# Altium PCB L298N Motor Driver Module PCB.PcbDoc
Units mm, origin at the board's own origin, x right, y up, seen from the top; angles counter-clockwise.
Board outline 53.34 x 43.18 mm, 2 copper layers (Top Layer, Bottom Layer), stack 1.64 mm thick; 36 components, 23 nets, 97 pads, 96 vias.
Unrouted connection lines stored in the file: 26.
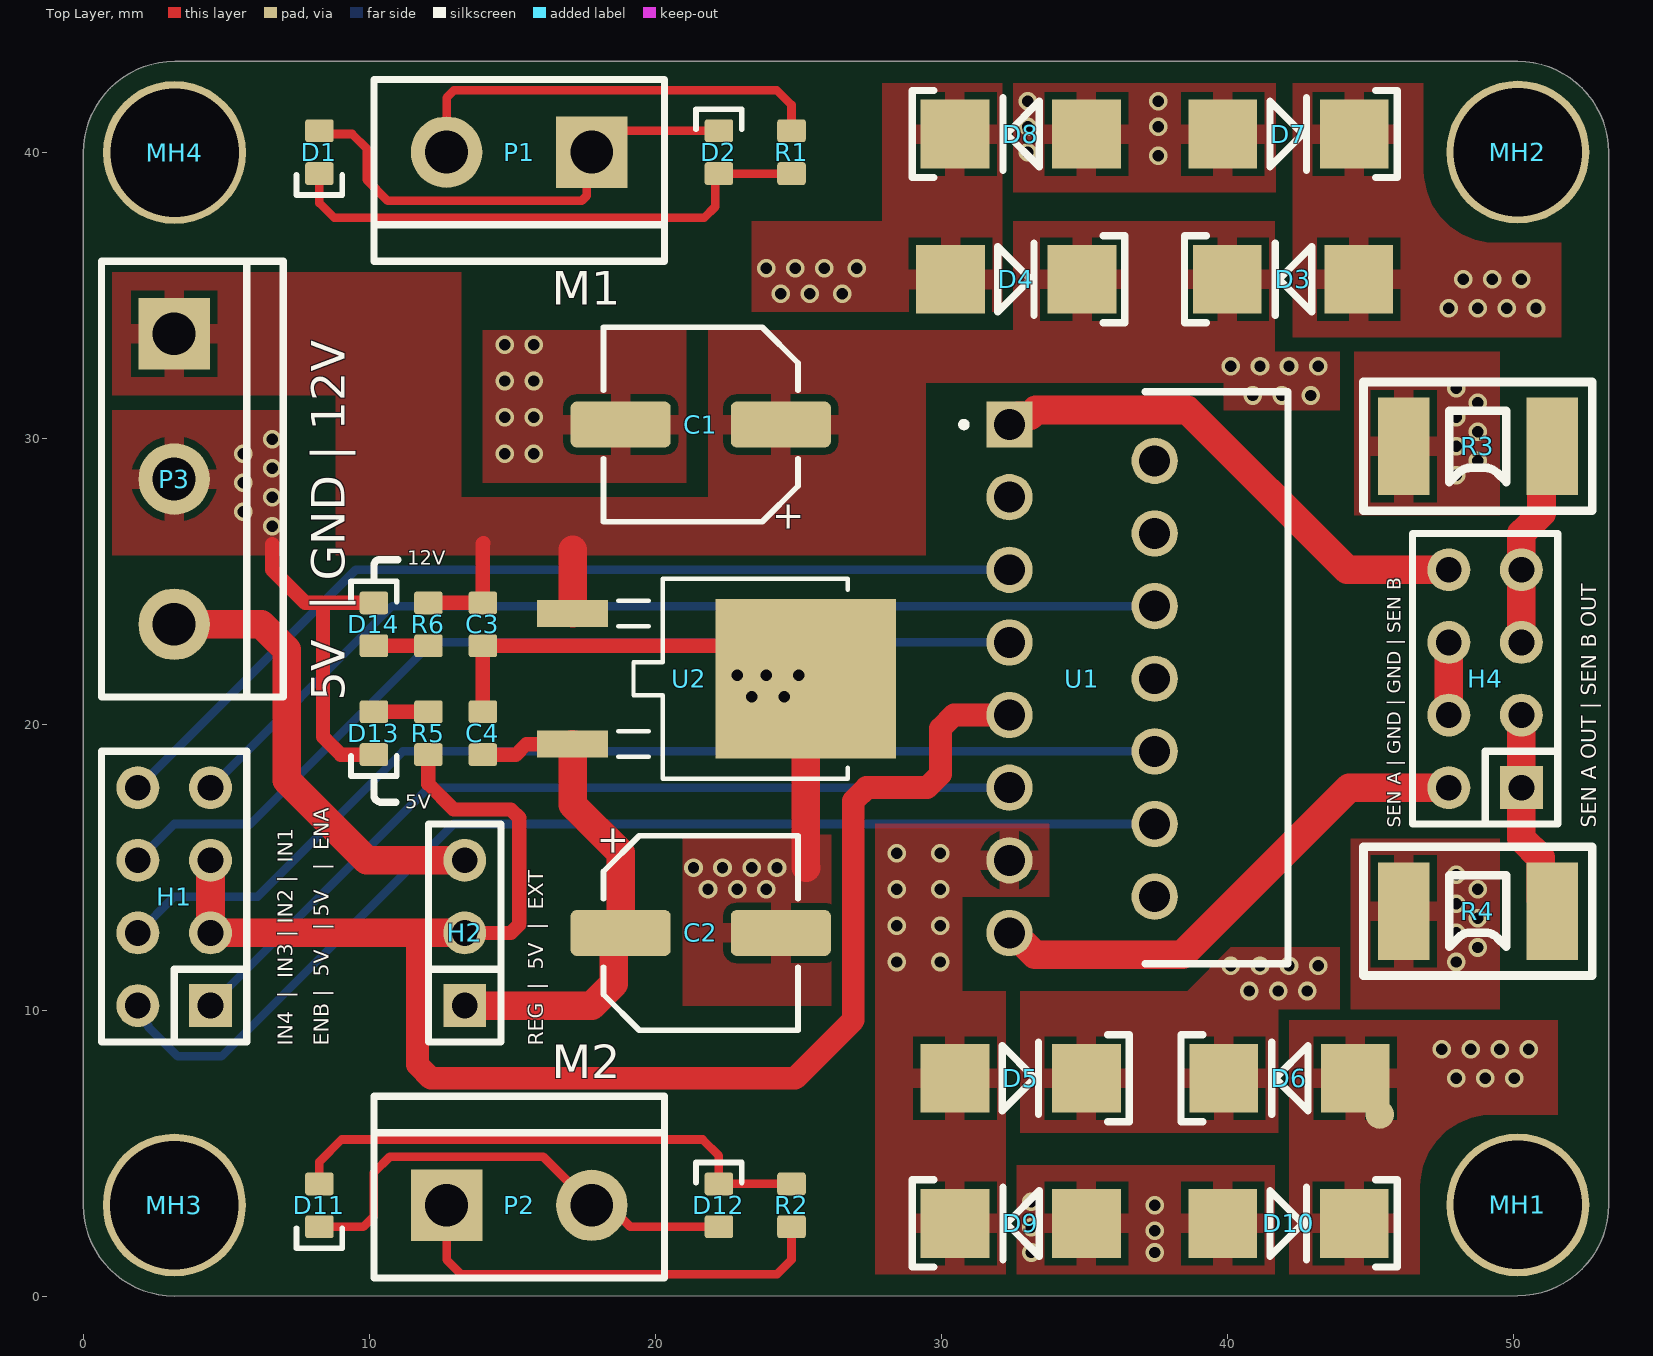
[diagram p0: Top Layer view]
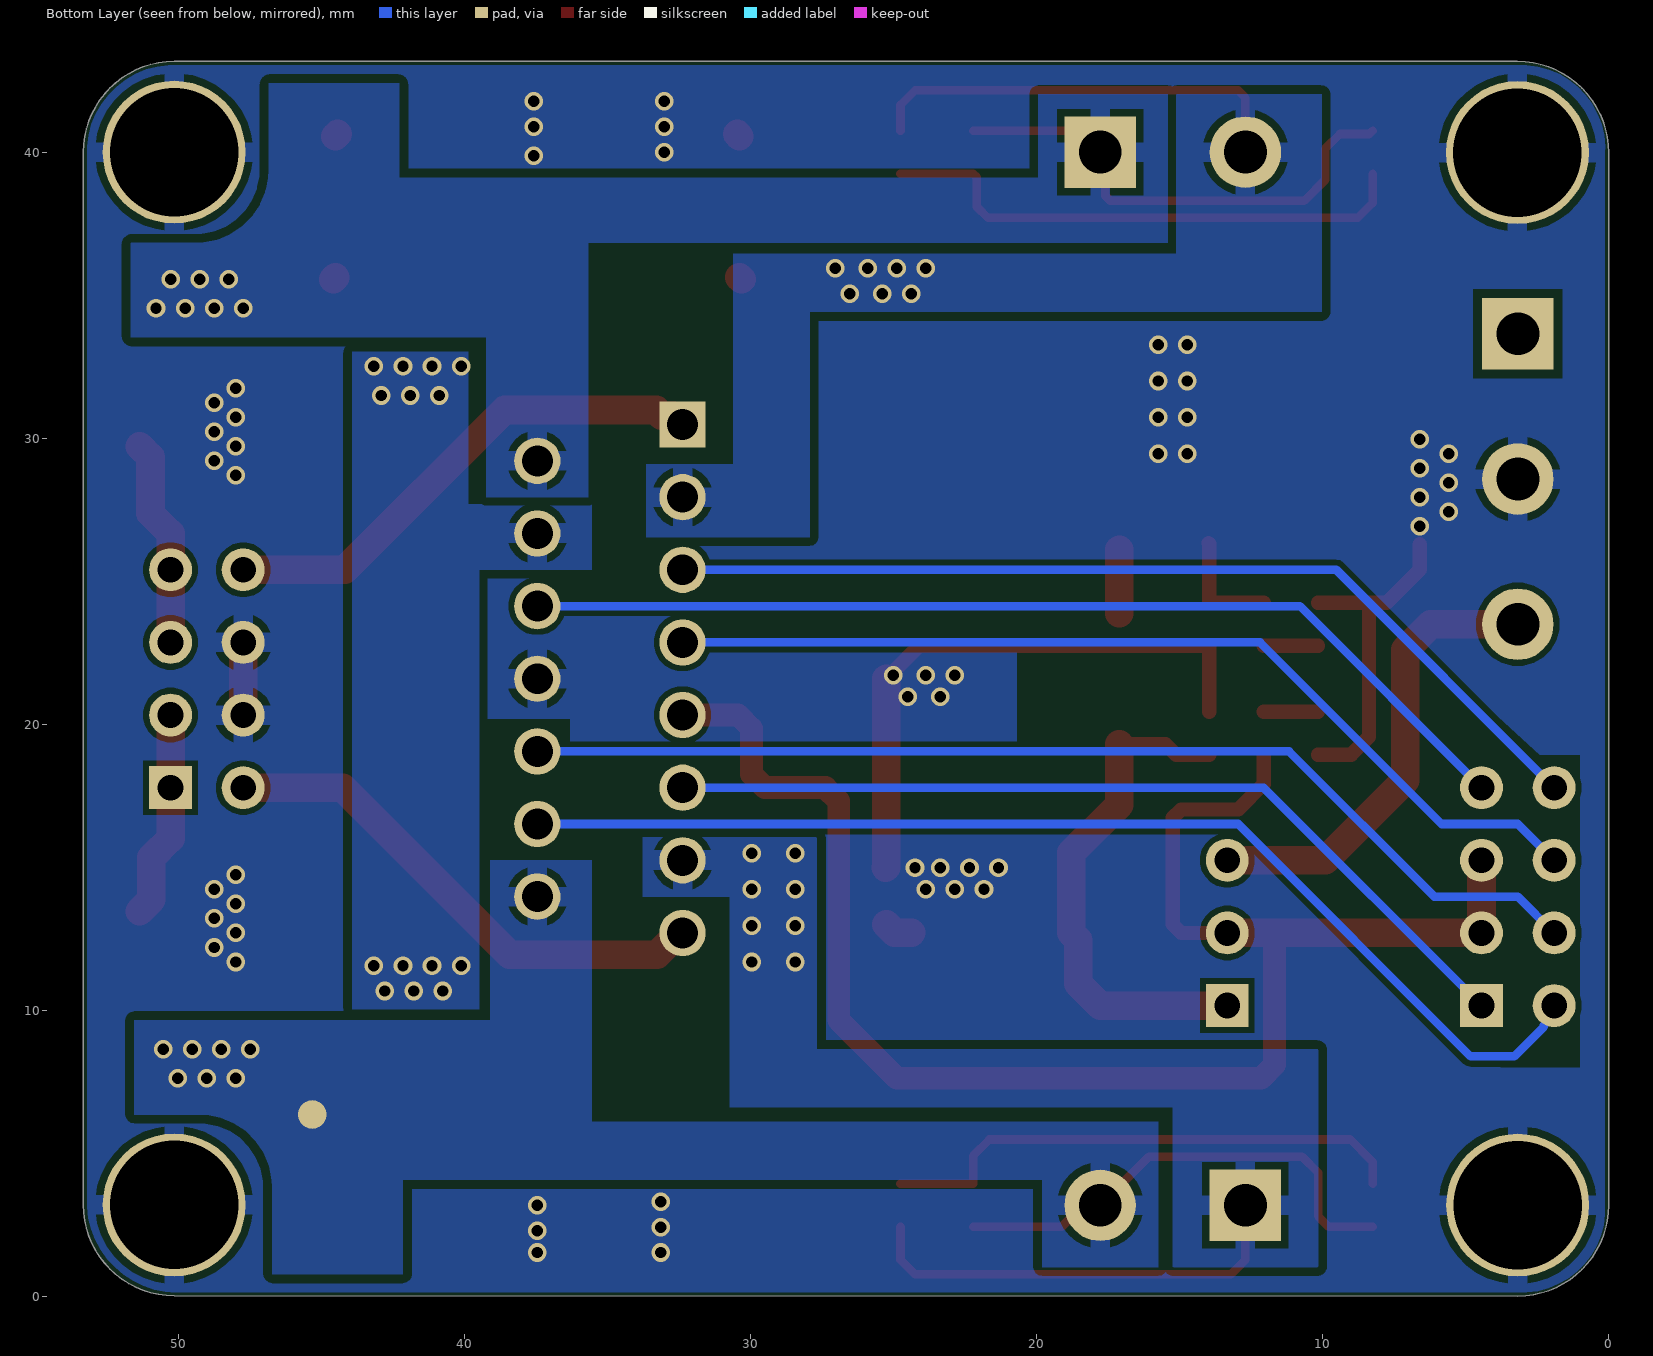
[diagram p1: Bottom Layer view, seen from below]
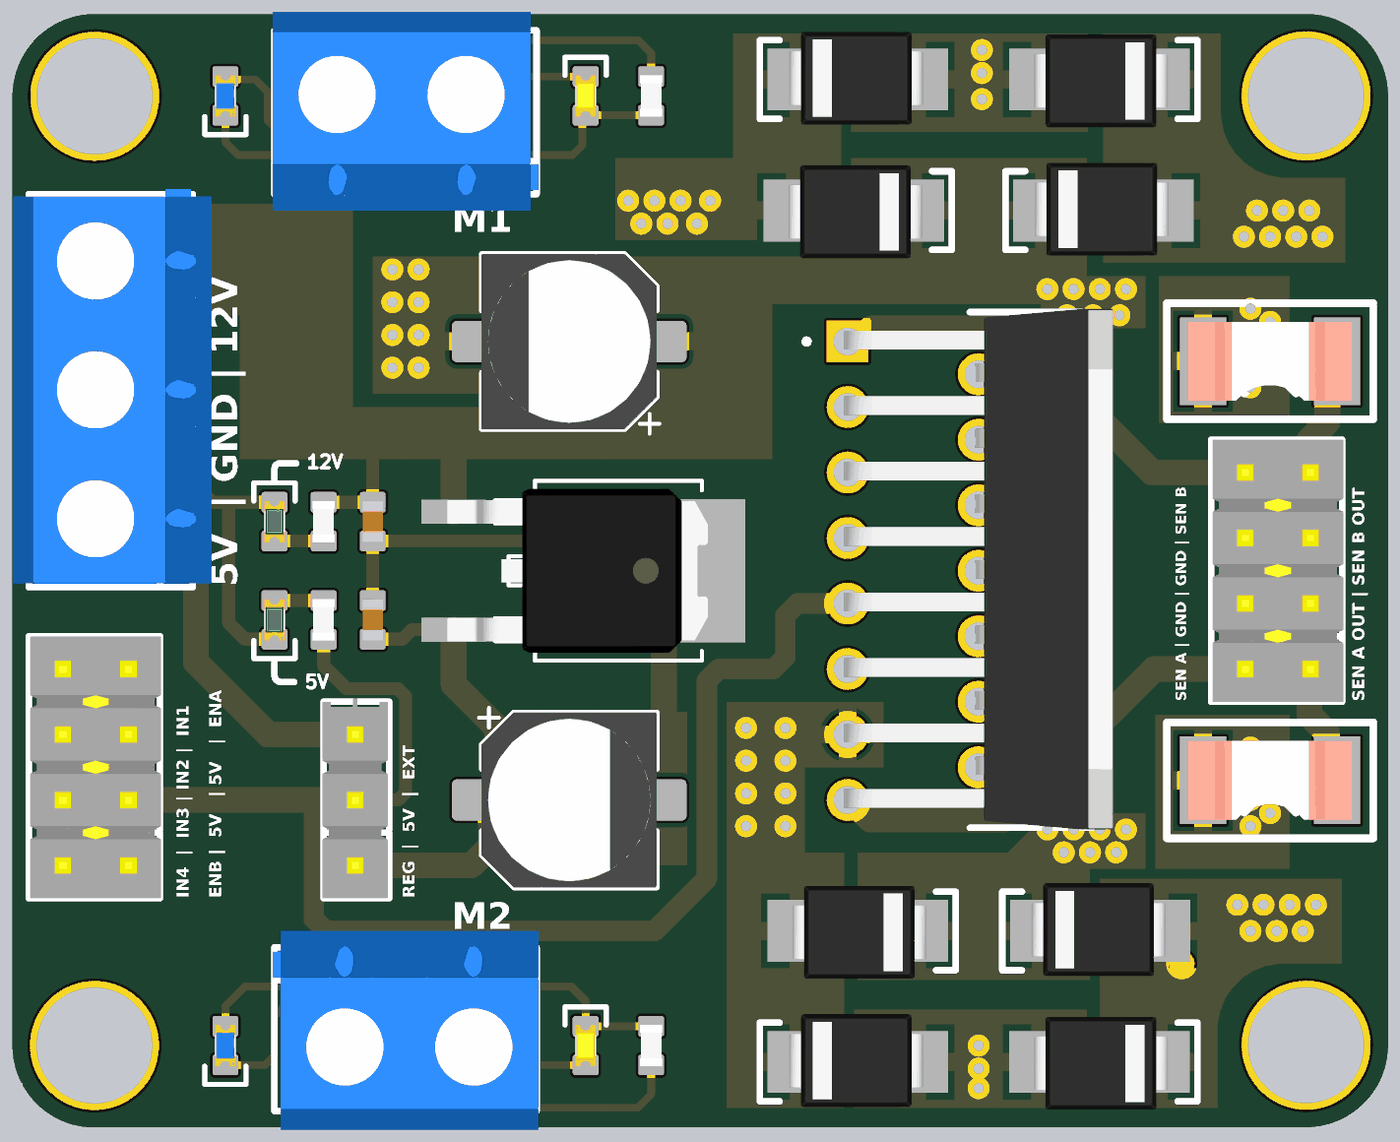
[diagram p2: 3D render of the assembled board from above, using the file's embedded part models]

## Layer stack, top to bottom
Top Solder: solder mask 0.0102, Solder Resist, Dk 3.5
Top Layer: signal copper 0.07
Dielectric 1: dielectric 1.5, FR-4, Dk 4.8
Bottom Layer: signal copper 0.07
Bottom Solder: solder mask 0.0102, Solder Resist, Dk 3.5

## Board outline
3.179,0 cw(c3.179,3.179) 0,3.179 0,39.99 cw(c3.19,39.99) 3.19,43.18 50.165,43.18 cw(c50.165,40.005) 53.34,40.005 53.34,3.189 cw(c50.165,3.189) 50.165,0.014

## Design rules (kind name [scope] priority, off if disabled: settings)
Clearance Clearence_Power [InNetClass('Power')] p1: gap=0.3 ignorepadtopadclearanceinfootprint=FALSE except(0: Arc-Hole Track-Hole SMDPad-Hole THPad-Hole Via-Hole Fill-Hole Poly-Hole Region-Hole Text-Hole)
Clearance Clearance_General [All] p2: gap=0.2 ignorepadtopadclearanceinfootprint=FALSE except(0: Arc-Hole Track-Hole SMDPad-Hole THPad-Hole Via-Hole Fill-Hole Poly-Hole Region-Hole Text-Hole)
HoleSize [All] p1: absolutevalues=TRUE maxlimit=5 minlimit=0.025 maxpercent=80.000 minpercent=20.000
MinimumSolderMaskSliver [All] p1: minsoldermaskwidth=0.005
PolygonConnect [All] p1: thpad.connectstyle=Relief thpad.reliefconductorwidth=0.7 thpad.reliefentries=4 thpad.polygonreliefangle="90 Angle" thpad.airgapwidth=0.254 smdpad.connectstyle=Relief smdpad.reliefconductorwidth=0.7 smdpad.reliefentries=4 smdpad.polygonreliefangle="90 Angle" smdpad.airgapwidth=0.254 via.connectstyle=Direct via.reliefconductorwidth=0.254 via.reliefentries=4 via.polygonreliefangle="90 Angle" via.airgapwidth=0.254
RoutingVias RoutingVias_Power [InNetClass('+5V Rail') OR InNetClass('Power')] p1: holewidth=0.5 width=1 viastyle="Through Hole" minholewidth=0.4 minwidth=0.8 maxholewidth=0.5 maxwidth=1
RoutingVias [All] p2: holewidth=0.4 width=0.8 viastyle="Through Hole" minholewidth=0.3 minwidth=0.6 maxholewidth=0.5 maxwidth=1
SilkToSilkClearance [All] p1: silktosilkclearance=0.1
SilkToSolderMaskClearance [IsPad] p1: minsilkscreentomaskgap=0.1 clearancetoexposedcopper=TRUE
SolderMaskExpansion [All] p1: expansion=0.102 istentingtop=FALSE
Width Width_5V_Rail [All] p1: maxlimit=1 minlimit=0.3 preferedwidth=0.5 minimp=50.000000 maximp=50.000000 favimp=50.000000
Width Width_VS_Power [InNetClass('Power')] p2: maxlimit=3 minlimit=1.5 preferedwidth=2 minimp=50.000000 maximp=50.000000 favimp=50.000000
Width [All] p3: maxlimit=0.5 minlimit=0.2 preferedwidth=0.3 minimp=50.000000 maximp=50.000000 favimp=50.000000
26 further rules are at their usual default settings.

## Classes and differential pairs
net class "+5V Rail": +5V
net class Power: OUT_1 OUT_2 OUT_3 OUT_4 Vs

## Components (designator, comment, footprint, x,y, rotation, side; value= is the part's Value field where it differs from the comment)
C1 "100uf" CAP_AE_SMD_D6MM3_H5M55 21.59,30.48 r180 top
C2 "100uf" CAP_AE_SMD_D6MM3_H5M55 21.59,12.7 r0 top
C3 "Cap" CAP_0603 13.97,23.495 r90 top value=0.1uf
C4 "Cap" CAP_0603 13.97,19.685 r270 top value=0.1uf
D1 "BLUE" LED_0603_BLUE 8.255,40.005 r90 top
D2 "YELLOW" LED_0603_YELLOW 22.225,40.005 r270 top
D3 "Diode" DIODE_M7_SMA 44.605,35.56 r180 top
D4 "Diode" DIODE_M7_SMA 30.325,35.56 r0 top
D5 "Diode" DIODE_M7_SMA 30.48,7.62 r0 top
D6 "Diode" DIODE_M7_SMA 44.478,7.62 r180 top
D7 "Diode" DIODE_M7_SMA 39.85,40.64 r0 top
D8 "Diode" DIODE_M7_SMA 35.08,40.64 r180 top
D9 "Diode" DIODE_M7_SMA 35.08,2.54 r180 top
D10 "Diode" DIODE_M7_SMA 39.85,2.54 r0 top
D11 "BLUE" LED_0603_BLUE 8.255,3.175 r90 top
D12 "YELLOW" LED_0603_YELLOW 22.225,3.175 r270 top
D13 "GREEN" LED_0603_GREEN 10.16,19.685 r90 top
D14 "GREEN" LED_0603_GREEN 10.16,23.495 r270 top
H1 "Header 4X2" "HEADER 2X4 2.54MM" 4.445,10.16 r90 top
H2 "Header 3" HEADER_1X3_2.54MM 13.335,10.16 r90 top
H4 "Header 4X2" "HEADER 2X4 2.54MM" 50.292,17.78 r90 top
MH1 "Mount_Hole_M4" MH_M4 50.165,3.189 r0 top
MH2 "Mount_Hole_M4" MH_M4 50.165,40.005 r0 top
MH3 "Mount_Hole_M4" MH_M4 3.179,3.179 r0 top
MH4 "Mount_Hole_M4" MH_M4 3.19,39.99 r0 top
P1 "MHDR1X2" "TERMINAL BLOCK 2 PIN 5.08MM" 17.78,40.005 r180 top
P2 "MHDR1X2" "TERMINAL BLOCK 2 PIN 5.08MM" 12.7,3.175 r0 top
P3 "TerminalBlock" "TERMINAL BLOCK 3 PIN 5.08MM" 3.175,33.655 r270 top
R1 "Res1" RES_0603 24.765,40.005 r270 top value=1.5k
R2 "Res1" RES_0603 24.765,3.175 r270 top value=1.5K
R3 "CSS2H-2512" CSS2H-2512 48.768,29.718 r0 top
R4 "CSS2H-2512" CSS2H-2512 48.768,13.462 r0 top
R5 "Res1" RES_0603 12.065,19.685 r270 top value=470R
R6 "Res1" RES_0603 12.065,23.495 r90 top value=1.5K
U1 "L298N" TO127P2020X500X2100-15 32.385,30.48 r0 top
U2 "L78M05CDT-TR" DPAK_STM 23.495,21.59 r270 top

## Footprints (in the part's own frame and the unit in brackets; to place one, negate y for a bottom-side part, rotate by r counter-clockwise, add the part's x,y. Pads: shape width x height; smd on the part's side, far side on the other; paste and mask are expansions set on the pad)
CAP_0603 [mm]
  rrect25% 0.8x1 smd: 1(-0.75,0) 2(0.75,0)
  body extent -0.8,-0.4 0.8,0.4, height 0.51
CAP_AE_SMD_D6MM3_H5M55 [mm] "Aluminum Electrolytic Capacitor, Body 6.30x6.60x5.50mm, IPC Low Density"
  rrect25% 3.5x1.6 smd: 1(-2.8,0) 2(2.8,0)
  silkscreen extent -3.4,-3.4 3.4,3.4, body extent -3.4,-3.4 3.4,3.4, height 6.4
CSS2H-2512 [mm]
  rect 1.8x3.4 smd: 1(-2.6,0) 2(2.6,0)
  silkscreen extent -4,-2.25 4,2.25, body extent -3.17,-1.52 3.18,1.52, height 0.84
DIODE_M7_SMA [mm]
  rect 2.4x2.4 smd mask+0: 1(0,0) 2(4.6,0)
  silkscreen extent 1.65,-1.52 6.1,1.52, body extent -0.24,-1.85 4.96,1.75, height 2.62
DPAK_STM [mil]
  rect 37x98 smd paste+0 mask+0: 1(-90,-251.5) 2(90,-251.5)
  rect 219x248 smd paste+0 mask+0: 3(0,69.5)
  silkscreen extent -138,-189 138,128, body extent -125,-261 125,136, height 94
"HEADER 2X4 2.54MM" [mm]
  rect 1.5x1.5 hole 0.9: 1(0,0)
  round 1.5 hole 0.9: 2(0,2.54) 3(2.54,0) 4(2.54,2.54) 5(5.08,0) 6(5.08,2.54) 7(7.62,0) 8(7.62,2.54)
  silkscreen extent -1.27,-1.27 8.89,3.81, body extent -1.27,-1.32 8.89,3.76, height 8.38
HEADER_1X3_2.54MM [mm]
  rect 1.5x1.5 hole 0.9: 1(0,0)
  round 1.5 hole 0.9: 2(2.54,0) 3(5.08,0)
  silkscreen extent -1.27,-1.27 6.35,1.27, body extent -1.27,-1.22 6.48,1.32, height 8.38
LED_0603_BLUE [mm]
  rrect25% 0.8x1 smd: A(0.75,0) K(-0.75,0)
  silkscreen extent -1.5,-0.8 -0.8,0.8, body extent -0.8,-0.4 0.8,0.4, height 0.6
LED_0603_GREEN [mm]
  rrect25% 0.8x1 smd: A(0.75,0) K(-0.75,0)
  silkscreen extent -1.5,-0.8 -0.8,0.8, body extent -0.8,-0.4 0.8,0.4, height 0.6
LED_0603_YELLOW [mm]
  rrect25% 0.8x1 smd: A(0.75,0) K(-0.75,0)
  silkscreen extent -1.5,-0.8 -0.8,0.8, body extent -0.8,-0.4 0.8,0.4, height 0.6
MH_M4 [mm]
  round 5 hole 4.5: MH(0,0)
RES_0603 [mm]
  rrect25% 0.8x1 smd: 1(-0.75,0) 2(0.75,0)
  body extent -0.8,-0.43 0.8,0.43, height 0.52
"TERMINAL BLOCK 2 PIN 5.08MM" [mm]
  rect 2.5x2.5 hole 1.5: 1(0,0)
  round 2.5 hole 1.5: 2(5.08,0)
  silkscreen extent -2.54,-2.54 7.62,3.81, body extent -2.61,-3.25 7.69,4.45, height 10
"TERMINAL BLOCK 3 PIN 5.08MM" [mm]
  rect 2.5x2.5 hole 1.5: 1(0,0)
  round 2.5 hole 1.5: 2(5.08,0) 3(10.16,0)
  silkscreen extent -2.54,-2.54 12.7,3.81, body extent -2.75,-3.15 12.55,4.55, height 10
TO127P2020X500X2100-15 [mm]
  rect 1.62x1.62 hole 1.08: 1(0,0)
  round 1.62 hole 1.08: 2(5.08,-1.27) 3(0,-2.54) 4(5.08,-3.81) 5(0,-5.08) 6(5.08,-6.35) 7(0,-7.62) 8(5.08,-8.89) 9(0,-10.16) 10(5.08,-11.43) 11(0,-12.7) 12(5.08,-13.97) 13(0,-15.24) 14(5.08,-16.51) 15(0,-17.78)
  silkscreen extent -1.69,-18.86 9.74,1.14, body extent -0.13,-18.93 10.29,1.27, height 24.15

## Part data
C1 C2: library part CAP_ALEL_6.3x5.5, "Capacitor SMD Aluminium Electrolytic 6.3mm Diameter 5.5mm Height"
C3 C4: "Capacitor", LatestRevisionDate=17-Jul-2002, LatestRevisionNote="Re-released for DXP Platform.", PackageDescription="Radial Cap, Thru-Hole; 2 Leads; 0.3 in Pin Spacing", PackageReference=RAD-0.3, Published=8-Jun-2000, Publisher="Altium Limited"
D1 D11: library part LED_0603_BLUE, "LED 0603 BLUE SMD"
D2 D12: library part LED_0603_YELLOW, "LED 0603 YELLOW SMD"
D3 D4 D5 D6 D7 D8 D9 D10: "Default Diode", Code_JEDEC=DO-214-AB, LatestRevisionDate=17-Jul-2002, LatestRevisionNote="Re-released for DXP Platform.", PackageDescription="DO-214-AB/SMC; 2 C-Bend Leads; Body 7.9 x 5.9 mm, inc. leads (LxW)", PackageReference=SMC, PackageVersion=Sep-1996, Published=8-Jun-2000, Publisher="Altium Limited"
D13 D14: library part LED_0603_GREEN, "LED 0603 GREEN SMD"
H1 H4: "Header, 4-Pin, Dual row", LatestRevisionDate=17-Jul-2002, LatestRevisionNote="Re-released for DXP Platform.", Publisher="Altium Limited"
H2: "Header, 3-Pin", LatestRevisionDate=17-Jul-2002, LatestRevisionNote="Re-released for DXP Platform.", Publisher="Altium Limited"
P1 P2: "Header, 2-Pin", LatestRevisionDate=17-Jul-2002, LatestRevisionNote="Re-released for DXP Platform.", Publisher="Altium Limited"
P3: library part "Header 3", "Header, 3-Pin", LatestRevisionDate=17-Jul-2002, LatestRevisionNote="Re-released for DXP Platform.", Publisher="Altium Limited"
R1 R2 R5 R6: "Resistor", LatestRevisionDate=17-Jul-2002, LatestRevisionNote="Re-released for DXP Platform.", PackageDescription="Axial Device, Thru-Hole; 2 Leads; 0.3 in Pin Spacing", PackageReference=AXIAL-0.3, Published=8-Jun-2000, Publisher="Altium Limited"
R3 R4: "Current Sense Resistor SMD CSS2H-2512", Manufacturer=Bourns, Manufacturer Part Number=CSS2H-2512
U1: "Dual Full Bridge Motor Driver 15-Pin(15+Tab) MULTIWATT V Tube", Package=None, Availability=Unavailable, MP=L298N, Price=None
U2: "Precision 500 mA regulators", Manufacturer_Name=STMicroelectronics, Copyright="Copyright (C) 2025 Ultra Librarian. All rights reserved.", Manufacturer_Part_Number=L78M05CDT-TR, RefDes=RefDes, Type=Type

## Free pads (board coordinates)
  round 1 all layers, no hole mask+0.102: 3(45.339,6.35)

## Via types
v1: diameter 0.65, hole 0.399, Top Layer to Bottom Layer, 96 vias

## Nets (pads, with @x,y where several pads share a name; then routed paths per layer and width w, separated by ;. In a path a pad name is that pad's centre, name@x,y a point inside that pad or via, vN(x,y) a via of type N, cw(c..) or ccw(c..) an arc to the next point about the centre after c; other vN are vias at no path point)
+5V: H1.3 H1.5 H2.2 R5.2 U1.9 | length 59.7
  Top Layer w0.5: R5.2 12.065,17.907 12.954,17.018 14.947,17.018 15.24,16.725 15.24,12.993 14.947,12.7 H2.2
  Top Layer w0.8: H2.2 11.684,12.7 11.684,8.089 12.153,7.62 24.892,7.62 26.924,9.652 26.924,17.311 27.393,17.78 27.686,17.78 29.503,17.78 29.972,18.249 29.972,19.851 30.441,20.32 U1.9
  Top Layer w1: H1.5 H1.3 11.684,12.7 H2.2
+5V_EXT: H2.3 P3.3 | length 16.3
  Top Layer w1: P3.3 6.223,23.495 7.112,22.606 7.112,18.034 9.906,15.24 H2.3
+5V_REG: C2.1 C4.2 H2.1 U2.2 | length 18
  Top Layer w0.5: C4.2 15.125,18.935 15.494,19.304 U2.2
  Top Layer w1: H2.1 17.78,10.16 18.542,10.922 18.542,12.452 C2.1 18.79,15.5 17.107,17.183 U2.2
EN_A: H1.7 U1.6 | length 35.7
  Bottom Layer w0.3: H1.7 10.795,24.13 U1.6
EN_B: H1.1 U1.11 | length 31.1
  Bottom Layer w0.3: H1.1 12.065,17.78 U1.11
GND: C1.2 C2.2 C3.1 C4.1 D7.1 D8.1 D9.1 D10.1 D13.K D14.K H4.4 H4.6 MH1.MH MH2.MH MH3.MH MH4.MH P3.2 R3.1 R4.1 U1.8 U2.3 | length 35.9
  Top Layer w0.5: 6.604,26.289 6.604,25.4 7.759,24.245 8.382,24.245 ; D13.K 9.005,18.935 8.382,19.558 8.382,24.245 ; D14.K 8.382,24.245 ; C4.1 C3.1 24.105,22.745 U2.3
  Top Layer w1: C2.2 24.96,12.7 C2.2@25.26,13 ; U2.3 25.26,14.999 25.273,14.986 ; H4.4 H4.6
  other v1: 33.147,1.524 37.465,1.524 37.465,2.286 33.147,2.413 37.465,3.175 33.147,3.302 48.006,11.684 48.768,12.192 48.006,12.7 48.768,13.208 48.006,13.716 21.844,14.224 22.86,14.224 23.876,14.224 48.768,14.224 48.006,14.732 21.336,14.986 22.352,14.986 23.368,14.986 24.257,14.986 23.368,20.955 24.511,20.955 22.86,21.717 23.876,21.717 25.019,21.717 6.604,26.924 5.588,27.432 6.604,27.94 5.588,28.448 48.006,28.702 6.604,28.956 48.768,29.21 5.588,29.464 14.732,29.464 15.748,29.464 48.006,29.718 6.604,29.972 48.768,30.226 14.732,30.734 15.748,30.734 48.006,30.734 48.768,31.242 48.006,31.75 14.732,32.004 15.748,32.004 14.732,33.274 15.748,33.274 37.592,39.878 33.02,40.005 33.02,40.894 37.592,40.894 33.02,41.783 37.592,41.783
IN1: H1.8 U1.5 | length 33.6
  Bottom Layer w0.3: H1.8 9.525,25.4 U1.5
IN2: H1.6 U1.7 | length 33.6
  Bottom Layer w0.3: H1.6 3.175,16.51 5.842,16.51 12.192,22.86 U1.7
IN3: H1.4 U1.10 | length 38.2
  Bottom Layer w0.3: H1.4 3.175,13.97 6.096,13.97 11.176,19.05 U1.10
IN4: H1.2 U1.12 | length 39.9
  Bottom Layer w0.3: H1.2 1.905,9.835 2.263,9.477 2.263,9.421 3.302,8.382 4.826,8.382 12.954,16.51 U1.12
NetD1_K: D1.K D2.A R1.2 | length 19
  Top Layer w0.3: D1.K 8.255,38.227 8.777,37.705 21.703,37.705 22.098,38.1 22.098,39.128 D2.A R1.2
NetD11_A: D11.A D12.K R2.1 | length 18.8
  Top Layer w0.3: D11.A 8.255,4.699 9.031,5.475 21.654,5.475 22.225,4.904 D12.K R2.1
NetD13_A: D13.A R5.1 | length 1.9
  Top Layer w0.5: D13.A R5.1
NetD14_A: D14.A R6.1 | length 1.9
  Top Layer w0.5: D14.A R6.1
OUT_1: D1.A D2.K D3.1 D7.2 P1.1 U1.2 | length 17.6
  Top Layer w0.3: D1.A 8.37,40.64 9.398,40.64 9.906,40.132 9.906,39.038 10.639,38.305 17.429,38.305 17.604,38.481 17.604,39.829 P1.1 18.53,40.755 D2.K
  Top Layer w1: D7.2 D7.2@44.528,40.562 ; D3.1@44.528,35.638 D3.1
  other v1: 47.752,34.544 48.768,34.544 49.784,34.544 50.8,34.544 48.26,35.56 49.276,35.56 50.292,35.56
OUT_2: D4.1 D8.2 P1.2 R1.1 U1.3 | length 15.4
  Top Layer w0.3: P1.2 12.7,41.91 12.954,42.164 24.255,42.164 24.765,41.654 R1.1
  Top Layer w1: D4.1 D4.1@30.402,35.638 ; D8.2@30.402,40.562 D8.2
  other v1: 24.384,35.052 25.4,35.052 26.543,35.052 23.876,35.941 24.892,35.941 25.908,35.941 27.051,35.941
OUT_3: D5.1 D9.2 P2.1 R2.2 U1.13 | length 15.5
  Top Layer w0.3: P2.1 12.7,1.27 13.208,0.762 24.257,0.762 24.765,1.27 R2.2
  other v1: 28.448,11.684 29.972,11.684 28.448,12.954 29.972,12.954 28.448,14.224 29.972,14.224 28.448,15.494 29.972,15.494
OUT_4: D6.1 D10.2 D11.K D12.A P2.2 pad.3 U1.14 | length 17.2
  Top Layer w0.3: D11.K 9.791,2.425 10.16,2.794 10.16,4.318 10.717,4.875 16.08,4.875 P2.2 18.375,3.175 19.125,2.425 D12.A
  Bottom Layer w1: P2.2 P2.2@17.99,3.385
  other v1: 48.006,7.62 49.022,7.62 50.038,7.62 47.498,8.636 48.514,8.636 49.53,8.636 50.546,8.636
Sense_A_IC: H4.8 U1.1 | length 17.9
  Top Layer w1: U1.1 32.695,30.79 33.113,30.79 33.311,30.988 38.608,30.988 44.196,25.4 H4.8
Sense_A_MCU: H4.1 H4.3 R4.2 | length 7.3
  Top Layer w1: H4.3 50.292,16.002 50.968,15.326 50.968,13.862 R4.2
Sense_B_IC: H4.2 U1.15 | length 18.1
  Top Layer w1: U1.15 32.519,12.7 33.281,11.938 38.433,11.938 44.275,17.78 H4.2
Sense_B_MCU: H4.5 H4.7 R3.2 | length 7.3
  Top Layer w1: H4.5 50.292,26.67 50.993,27.371 50.993,29.343 R3.2
Vs: C1.1 C3.2 D3.2 D4.2 D5.2 D6.2 P3.1 R6.2 U1.4 U2.1 | length 6.3
  Top Layer w0.5: R6.2 C3.2 13.97,26.314 13.995,26.34 ; 17.107,26.098 17.145,26.137
  Top Layer w1: U2.1 17.107,26.098
  other v1: 40.767,10.668 41.783,10.668 42.799,10.668 40.132,11.557 41.148,11.557 42.164,11.557 43.18,11.557 40.894,31.496 41.91,31.496 42.926,31.496 40.132,32.512 41.148,32.512 42.164,32.512 43.18,32.512

## Polygon pours and split planes (outlines as drawn)
GND on Bottom Layer "GND_L02_P035" (solid, remove dead copper, pour order 35): 46.863,43.053 50.165,43.053 cw(c50.165,40.005) 53.213,40.005 53.213,36.83 53.213,6.35 53.213,3.316 cw(c50.013,3.316) 50.278,0.127 46.736,0.127 6.35,0.127 3.052,0.127 cw(c3.052,3.052) 0.127,3.052 0.127,6.096 0.127,36.576 0.127,39.116 0.127,40.005 cw(c3.063,40.115) 3.063,43.053
OUT_3 on Bottom Layer "OUT_3_L02_P015" (solid, pour order 15): 15.24,6.604 15.24,1.016 10.16,1.016 10.16,8.636 27.686,8.636 27.686,16.256 30.734,16.256 33.782,16.256 33.782,13.97 30.734,13.97 30.734,6.604
Vs on Bottom Layer "Bottom Layer-Vs" (solid, pour order 27): 39.497,10.033 43.942,10.033 43.942,33.02 39.878,33.02 39.878,27.686 35.56,27.686 35.56,25.4 39.497,25.4 39.497,15.748
OUT_1 on Bottom Layer "Bottom Layer-OUT_1" (solid, pour order 23): 42.291,42.418 46.863,42.418 46.863,39.37 ccw(c49.403,39.37) 49.403,36.83 51.689,36.83 51.689,33.528 39.243,33.528 39.243,27.94 35.687,27.94 35.687,36.83 15.392,36.83 15.392,42.037 19.939,42.037 19.939,39.116 42.291,39.116
OUT_2 on Bottom Layer "OUT_2_L02_P019" (solid, pour order 19): 15.113,36.449 15.113,42.037 10.033,42.037 10.033,34.417 27.94,34.417 27.94,26.543 30.607,26.543 33.655,26.543 33.655,29.083 30.607,29.083 30.607,36.449
OUT_4 on Bottom Layer "Bottom Layer-OUT_4" (solid, pour order 22): 42.164,0.762 46.736,0.762 46.736,3.81 cw(c49.276,3.81) 49.276,6.35 51.562,6.35 51.562,9.652 39.116,9.652 39.116,15.24 35.56,15.24 35.56,6.096 15.748,6.096 15.748,1.016 19.812,1.016 19.812,4.064 42.164,4.064
GND on Top Layer "GND_L01_P040" (solid, pour order 40): 26.162,16.129 26.162,10.16 20.955,10.16 20.955,16.129
GND on Top Layer "GND_L01_P039" (solid, pour order 39): 44.323,10.033 44.323,16.002 49.53,16.002 49.53,10.033
GND on Top Layer "GND_L01_P038" (solid, pour order 38): 44.45,33.02 44.45,27.305 49.53,27.305 49.53,33.02
GND on Top Layer "GND_L01_P034" (solid, pour order 34): 1.016,30.988 7.112,30.988 7.112,25.908 1.016,25.908
OUT_2 on Top Layer "Top Layer-OUT_2" (solid, pour order 32): 23.368,34.417 32.131,34.417 32.131,42.418 27.94,42.418 27.94,37.592 23.368,37.592
GND on Top Layer "GND_L01_P029" (solid, pour order 29): 21.082,33.782 21.082,28.448 13.97,28.448 13.97,33.782
Vs on Top Layer "VS_L01_P028" (solid, pour order 28): 43.942,33.02 43.942,30.988 39.878,30.988 39.878,33.02 41.656,33.02
Vs on Top Layer "VS_L01_P021" (solid, pour order 21): 41.656,37.592 32.512,37.592 32.512,33.782 21.844,33.782 21.844,27.94 13.208,27.94 13.208,35.814 1.016,35.814 1.016,31.496 8.821,31.496 8.821,25.908 29.464,25.908 29.464,31.936 41.656,31.936
GND on Top Layer "GND_L01_P018" (solid, pour order 18): 41.698,42.42 41.698,38.61 32.512,38.61 32.512,42.42 33.57,42.42
OUT_1 on Top Layer "OUT_1_L01_P016" (solid, pour order 16): 49.403,36.83 cw(c49.403,39.37) 46.863,39.37 46.863,42.418 42.291,42.418 42.291,33.528 51.689,33.528 51.689,36.83
OUT_3 on Top Layer "OUT_3_L01_P013" (solid, pour order 13): 33.782,13.97 33.782,16.51 27.686,16.51 27.686,0.762 32.258,0.762 32.258,10.668 30.734,10.668 30.734,13.97
GND on Top Layer "GND_L01_P012" (solid, pour order 12): 41.656,4.572 41.656,0.762 32.639,0.762 32.639,4.572 33.528,4.572
Vs on Top Layer "VS_L01_P009" (solid, pour order 9): 41.783,10.033 43.942,10.033 43.942,12.192 40.132,12.192 38.608,10.668 32.766,10.668 32.766,5.715 41.783,5.715
OUT_4 on Top Layer "OUT_4_L01_P008" (solid, pour order 8): 49.276,6.35 ccw(c49.276,3.81) 46.736,3.81 46.736,0.762 42.164,0.762 42.164,9.652 51.562,9.652 51.562,6.35

## Other copper
Bottom Layer:
  pour cut-out: 39.243,20.193 36.703,20.193 36.322,20.193 36.322,19.939 36.322,19.812 36.322,19.407 36.322,19.177 35.306,19.177 20.701,19.289 20.701,25.146 14.844,25.146 9.525,25.4 2.413,18.923 1.778,18.923 1.016,18.923 1.016,8.001 3.777,8.001 12.954,16.891 13.716,16.891 36.322,16.891 36.322,16.002 36.703,15.621 39.243,15.621 39.243,19.685

## Silkscreen, mask and mechanical layers (free items; w line width, h text height)
Top Overlay:
  lines w0.254: 10.16,18.034 10.16,17.526 ccw(c10.414,17.526) 10.414,17.272 10.922,17.272 ; 10.16,25.097 10.16,25.552 cw(c10.363,25.552) 10.363,25.756 10.998,25.756
  text "M1" at 16.383,34.29 h2
  text "12V" at 11.326,25.575 h0.5
  text "5V  | GND | 12V" at 9.525,20.828 h2 r90
  text "5V" at 11.25,17.041 h0.5
  text "SEN A | GND | GND | SEN B" at 46.228,16.383 h0.8 r90
  text "SEN A OUT | SEN B OUT" at 53.086,16.383 h0.9 r90
  text "IN4  |  IN3 | IN2 |  IN1" at 7.493,8.763 h0.9 r90
  text "ENB |  5V   | 5V   |  ENA" at 8.763,8.763 h0.9 r90
  text "REG  |  5V  |  EXT" at 16.256,8.763 h0.9 r90
  text "M2" at 16.383,7.239 h2
Mechanical 1:
  lines w0.254: 0,3.179 ccw(c3.179,3.179) 3.179,0 50.165,0.014 ccw(c50.165,3.189) 53.34,3.189 53.34,40.005 ccw(c50.165,40.005) 50.165,43.18 3.19,43.18 ccw(c3.19,39.99) 0,39.99 0,3.179 ; 0,5.08 ccw(c0,5.08) 0,5.08 ; 53.34,5.08 ccw(c53.34,5.08) 53.34,5.08
Mechanical 13:
  drawing of 191 lines, arcs and shapes, not listed
  text "Layer" at 70.415,38.767 h2.66
  text "Name" at 88.212,38.767 h2.66
  text "Material" at 129.059,38.767 h2.66
  text "Thickness" at 166.803,38.767 h2.66
  text "Constant" at 195.238,38.767 h2.66
  text "Board Layer Stack" at 220.127,38.767 h2.66
  text "Top Overlay" at 88.212,33.446 h2.66
  text "Top Solder" at 88.212,28.125 h2.66
  text "Solder Resist" at 129.059,28.125 h2.66
  text "0.40mil" at 166.803,28.125 h2.66
  text "3.5" at 195.238,28.125 h2.66
  text "1" at 70.415,22.804 h2.66
  text "Top Layer" at 88.212,22.804 h2.66
  text "2.76mil" at 166.803,22.804 h2.66
  text "Dielectric 1" at 88.212,17.483 h2.66
  text "FR-4" at 129.059,17.483 h2.66
  text "59.06mil" at 166.803,17.483 h2.66
  text "4.8" at 195.238,17.483 h2.66
  text "2" at 70.415,12.162 h2.66
  text "Bottom Layer" at 88.212,12.162 h2.66
  text "2.76mil" at 166.803,12.162 h2.66
  text "Bottom Solder" at 88.212,6.842 h2.66
  text "Solder Resist" at 129.059,6.842 h2.66
  text "0.40mil" at 166.803,6.842 h2.66
  text "3.5" at 195.238,6.842 h2.66
  text "Bottom Overlay" at 88.212,1.521 h2.66

## Dimensions
50.165,0.014 to 50.165,43.18 on Mechanical 13
0,39.99 to 53.34,40.005 on Mechanical 13

## Text inside footprints (layer, text, board x,y; h text height)
C1: Top Overlay "+" at 25.223,27.68 h1 r180; Mechanical 13 "+" at 25.223,27.68 h1 r180
C2: Top Overlay "+" at 17.957,15.5 h1; Mechanical 13 "+" at 17.957,15.5 h1
D1: Mechanical 13 "+" at 7.647,41.322 h0.5 r90
D2: Mechanical 13 "+" at 22.833,38.688 h0.5 r270
D11: Mechanical 13 "+" at 7.647,4.492 h0.5 r90
D12: Mechanical 13 "+" at 22.833,1.858 h0.5 r270
D13: Mechanical 13 "+" at 9.552,21.002 h0.5 r90
D14: Mechanical 13 "+" at 10.768,22.178 h0.5 r270